# EAGLE board PaddleClock-graphpad-v1a (EAGLE 5.07)
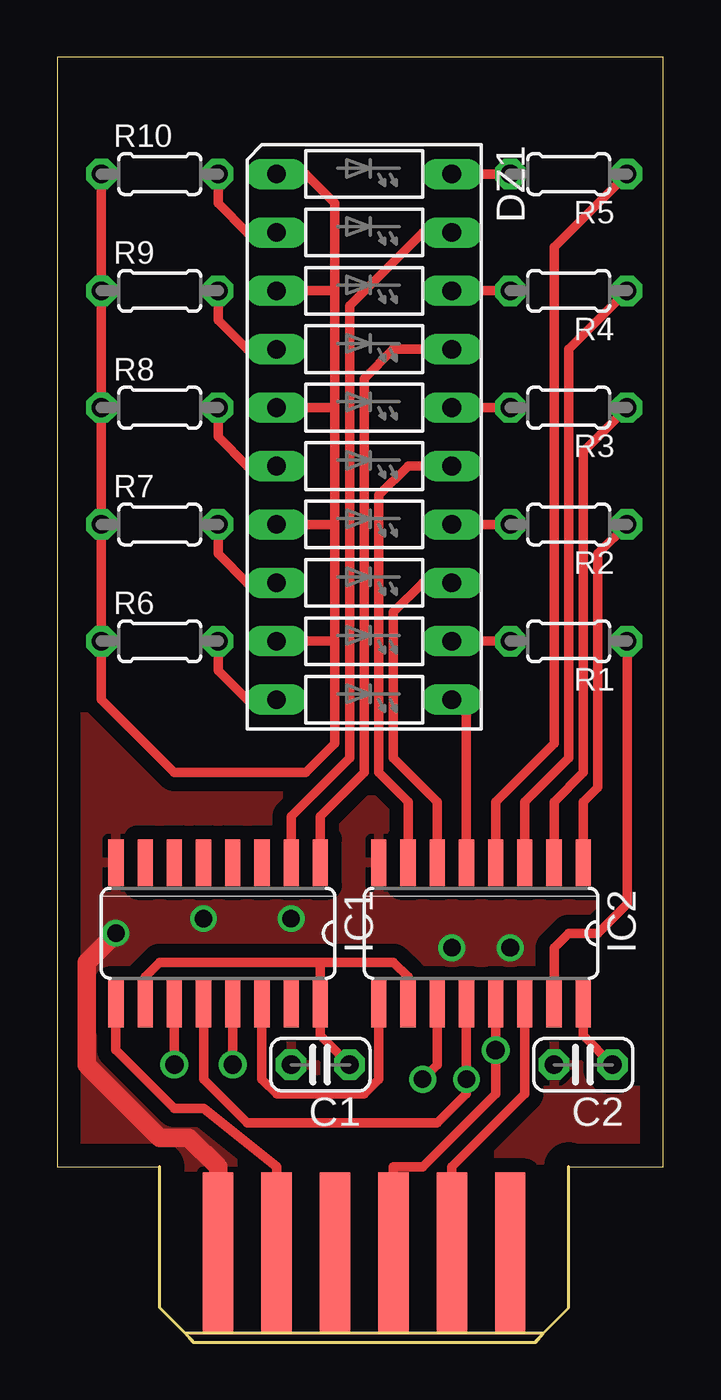
[diagram p0: board, top side]
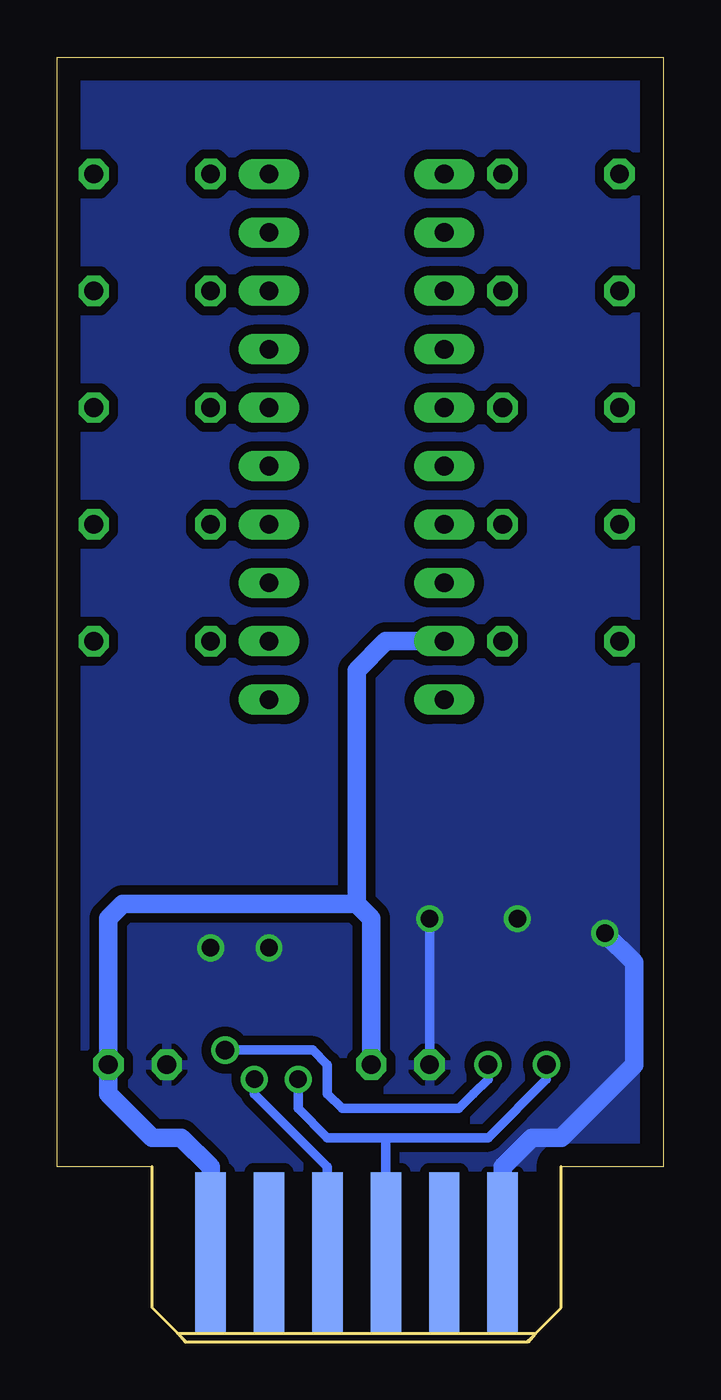
[diagram p1: board, bottom side, seen from below]

Size 26.34 x 55.87 mm. Coordinates in mm from the lower left corner, seen from the top.
Outline: 4.45,7.62 0,7.62 0,55.87 26.34,55.87 26.34,7.62 22.22,7.62
Copper layers (1*16): Top 0.035mm / dielectric 1.5mm / Bottom 0.035mm
Design rules "10mils": minimum track width 10mil, minimum drill 24mil, track to track 10mil, track to pad 10mil, pad to pad 10mil, via to via 10mil, smd to smd 10mil, copper to edge 40mil, drill to drill 10mil, minimum pad ring 10mil, minimum via ring 8mil, stop-mask expansion 0mil, vias tented up to drill 0mil, thermal gap 10mil

## Footprints (pad centres in the part's own frame; a part is rotated, then mirrored left to right if it is on the bottom)
C025-024X044 = drill 0.813 octagon: 1 -1.27,0; 2 1.27,0
PCB_EDGE_CONNECTOR_6X2 = smd 1.32 x 7: A1 -6.35,0.062; A2 -3.81,0.062; A3 -1.27,0.062; A4 1.27,0.062; A5 3.81,0.062; A6 6.35,0.062 | smd 1.32 x 7 bottom: B1 -6.35,0.062; B2 -3.81,0.062; B3 -1.27,0.062; B4 1.27,0.062; B5 3.81,0.062; B6 6.35,0.062
LB10 = drill 0.813 long: 1 -11.43,-3.81; 2 -8.89,-3.81; 3 -6.35,-3.81; 4 -3.81,-3.81; 5 -1.27,-3.81; 6 1.27,-3.81; 7 3.81,-3.81; 8 6.35,-3.81; 9 8.89,-3.81; 10 11.43,-3.81; 11 11.43,3.81; 12 8.89,3.81; 13 6.35,3.81; 14 3.81,3.81; 15 1.27,3.81; 16 -1.27,3.81; 17 -3.81,3.81; 18 -6.35,3.81; 19 -8.89,3.81; 20 -11.43,3.81
SO16 = smd 0.66 x 2.032: 1 -4.445,-3.073; 2 -3.175,-3.073; 3 -1.905,-3.073; 4 -0.635,-3.073; 5 0.635,-3.073; 6 1.905,-3.073; 7 3.175,-3.073; 8 4.445,-3.073; 9 4.445,3.073; 10 3.175,3.073; 11 1.905,3.073; 12 0.635,3.073; 13 -0.635,3.073; 14 -1.905,3.073; 15 -3.175,3.073; 16 -4.445,3.073
0204/5 = drill 0.813 octagon: 1 -2.54,0; 2 2.54,0

## Placement (x,y rotation side)
C1  [C025-024X044]  11.43,12.06 180 top
C2  [C025-024X044]  22.86,12.06 180 top
CONN1  PCB_EDGE_CONNECTOR_6X2  [PCB_EDGE_CONNECTOR_6X2]  13.34,3.81 0 top
DZ1  LB10  [LB10]  13.34,39.37 270 top
IC1  74HC595D  [SO16]  6.99,17.78 180 top
IC2  74HC595D  [SO16]  18.41,17.78 180 top
R1  [0204/5]  22.22,30.48 180 top
R2  [0204/5]  22.22,35.56 180 top
R3  [0204/5]  22.22,40.64 180 top
R4  [0204/5]  22.22,45.72 180 top
R5  [0204/5]  22.22,50.8 180 top
R6  [0204/5]  4.45,30.48 0 top
R7  [0204/5]  4.45,35.56 0 top
R8  [0204/5]  4.45,40.64 0 top
R9  [0204/5]  4.45,45.72 0 top
R10  [0204/5]  4.45,50.8 0 top

## Library data of the parts
C1 C2 R1-R10 = rcl
CONN1 = dp_devices
DZ1 = led
IC1 IC2 = 74xx-eu

## Nets
1C: DZ1.20 R5.2
2C: DZ1.19 IC1.2
3C: DZ1.18 R4.2
4C: DZ1.17 IC1.1
5C: DZ1.16 R3.2
6C: DZ1.15 IC2.7
7C: DZ1.14 R2.2
8C: DZ1.13 IC2.6
9C: DZ1.12 R1.2
10C: DZ1.11 IC2.5
!OE: CONN1.A4 IC1.13 IC2.13
CLK: CONN1.B3 IC1.11 IC2.11
DI: CONN1.A5 IC2.14
DO: CONN1.A2 IC1.9
GND: C1.2 C2.2 CONN1.A1 CONN1.B1 IC1.8 IC2.8
IC2-DO: IC1.14 IC2.9
LAT: CONN1.B4 IC1.12 IC2.12
N$1: DZ1.2 R10.2
N$3: IC2.15 R1.1
N$4: IC2.1 R2.1
N$5: IC2.2 R3.1
N$6: IC2.3 R4.1
N$7: IC2.4 R5.1
N$11: DZ1.10 R6.2
N$21: DZ1.8 R7.2
N$27: DZ1.6 R8.2
N$31: DZ1.4 R9.2
V+: C1.1 C2.1 CONN1.B6 DZ1.1 DZ1.3 DZ1.5 DZ1.7 DZ1.9 IC1.10 IC1.16 IC2.10 IC2.16 R6.1 R7.1 R8.1 R9.1 R10.1

## Tracks (layer width: path | path; a pad name or v marks a point on that pad's centre or on a via)
1C
  Top 0.406: DZ1.20 R5.2
2C
  Top 0.406: IC1.2 10.16,22.86 12.7,25.4 12.7,45.09 15.88,48.26 DZ1.19
3C
  Top 0.406: DZ1.18 R4.2
4C
  Top 0.406: IC1.1 11.43,22.86 13.34,24.77 13.34,41.91 14.61,43.18 DZ1.17
5C
  Top 0.406: DZ1.16 R3.2
6C
  Top 0.406: IC2.7 15.24,23.5 13.97,24.77 13.97,36.83 15.24,38.1 DZ1.15
7C
  Top 0.406: DZ1.14 R2.2
8C
  Top 0.406: IC2.6 16.51,23.5 14.61,25.4 14.61,31.75 15.88,33.02 DZ1.13
9C
  Top 0.406: DZ1.12 R1.2
10C
  Top 0.406: IC2.5 17.78,27.3 DZ1.11
!OE  (via drill 0.8 pad 1.02)
  Top 0.406: v7.62,12.06 IC1.13 | IC2.13 v19.05,12.7 19.05,10.79 15.88,7.62 14.61,7.62 CONN1.A4
  Bottom 0.406: v7.62,12.06 7.62,11.43 8.26,10.79 8.89,10.16 13.97,10.16 14.61,10.79 14.61,12.06 15.24,12.7 v19.05,12.7
CLK  (via drill 0.76, 0.8 pad 1.02)
  Top 0.406: v15.88,11.43 16.51,12.06 IC2.11 | v5.08,12.06 IC1.11
  Bottom 0.406: v15.88,11.43 15.88,10.16 14.61,8.89 12.06,8.89 | v5.08,12.06 5.08,11.43 7.62,8.89 12.06,8.89 | CONN1.B3 12.06,8.89
DI
  Top 0.406: IC2.14 20.32,10.79 17.14,7.62 CONN1.A5
DO
  Top 0.406: IC1.9 2.54,12.7 5.08,10.16 6.35,10.16 9.53,7.62 CONN1.A2
GND  (via drill 0.76)
  Top 0.813: CONN1.B1 6.99,7.62 5.71,8.89 4.45,8.89 1.27,12.06 1.27,16.51 v2.54,17.78
  Bottom 0.406: C1.2 v10.16,18.41
  Bottom 0.813: CONN1.B1 6.99,7.62 5.71,8.89 4.45,8.89 1.27,12.06 1.27,16.51 v2.54,17.78
  other vias: 19.68,17.14 17.14,17.14 6.35,18.41
  pour Top (isolate 0.61): 0.64,55.88 26.04,55.88 26.04,7.62 0.64,7.62
  pour Bottom (isolate 0.406): -0.64,55.88 26.04,55.88 26.04,7.62 -0.64,7.62
IC2-DO
  Top 0.406: IC2.9 13.97,11.43 13.34,10.79 9.53,10.79 8.89,11.43 IC1.14
LAT  (via drill 0.76)
  Top 0.406: IC2.12 v17.78,11.43 17.78,10.79 16.51,9.53 8.26,9.53 6.35,11.43 IC1.12
  Bottom 0.406: v17.78,11.43 17.78,10.79 14.61,7.62 CONN1.B4
N$1
  Top 0.406: R10.2 6.99,49.53 8.26,48.26 DZ1.2
N$3
  Top 0.406: IC2.15 21.59,17.14 22.22,17.78 23.49,17.78 24.76,19.05 R1.1
N$4
  Top 0.406: IC2.1 22.86,23.5 23.49,24.13 23.49,34.29 R2.1
N$5
  Top 0.406: IC2.2 21.59,23.5 22.86,24.77 22.86,38.74 R3.1
N$6
  Top 0.406: IC2.3 20.32,23.5 22.22,25.4 22.22,43.18 R4.1
N$7
  Top 0.406: IC2.4 19.05,23.5 21.59,26.04 21.59,47.62 R5.1
N$11
  Top 0.406: R6.2 6.99,29.21 8.26,27.94 DZ1.10
N$21
  Top 0.406: R7.2 6.99,34.29 8.26,33.02 DZ1.8
N$27
  Top 0.406: R8.2 6.99,39.37 8.26,38.1 DZ1.6
N$31
  Top 0.406: R9.2 6.99,44.45 8.26,43.18 DZ1.4
V+
  Top 0.406: C1.1 11.43,13.33 IC1.16 11.43,16.51 | IC2.16 22.86,13.33 C2.1 | DZ1.9 12.06,30.48 | 12.06,30.48 12.06,35.56 | 12.06,35.56 DZ1.7 | 12.06,35.56 12.06,40.64 | 12.06,40.64 DZ1.5 | 12.06,40.64 12.06,45.72 | 12.06,45.72 DZ1.3 | 12.06,45.72 12.06,49.53 10.79,50.8 DZ1.1 | 12.06,30.48 12.06,26.04 10.79,24.77 5.08,24.77 1.91,27.94 R6.1 R7.1 R8.1 R9.1 R10.1 | IC2.10 15.24,15.88 14.61,16.51 11.43,16.51 | IC1.10 3.81,15.88 4.45,16.51 11.43,16.51
  Bottom 0.813: 13.34,19.05 12.7,18.41 C1.1 | 13.34,19.05 23.49,19.05 24.13,18.41 C2.1 24.13,10.79 22.22,8.89 20.95,8.89 19.68,7.62 CONN1.B6 | 13.34,19.05 13.34,29.21 12.06,30.48 DZ1.9